# EAGLE board module (EAGLE 9.0.1)
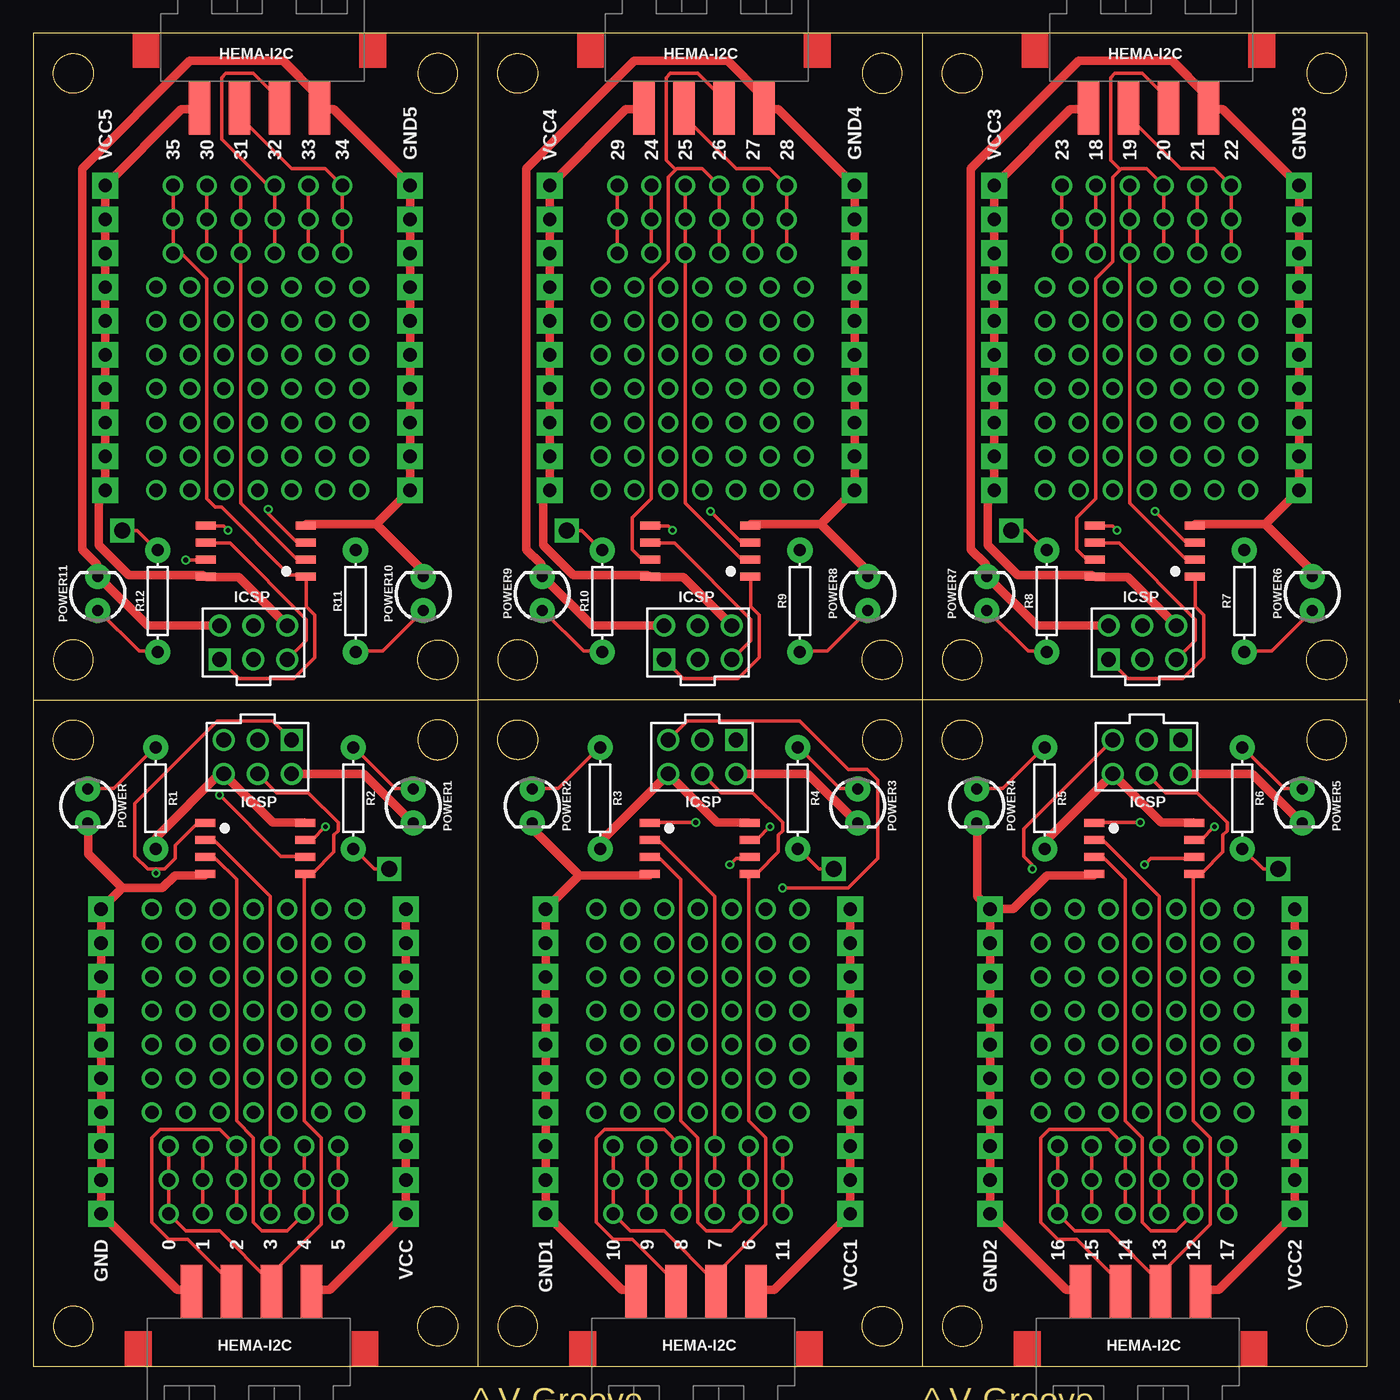
[diagram p0: board, top side]
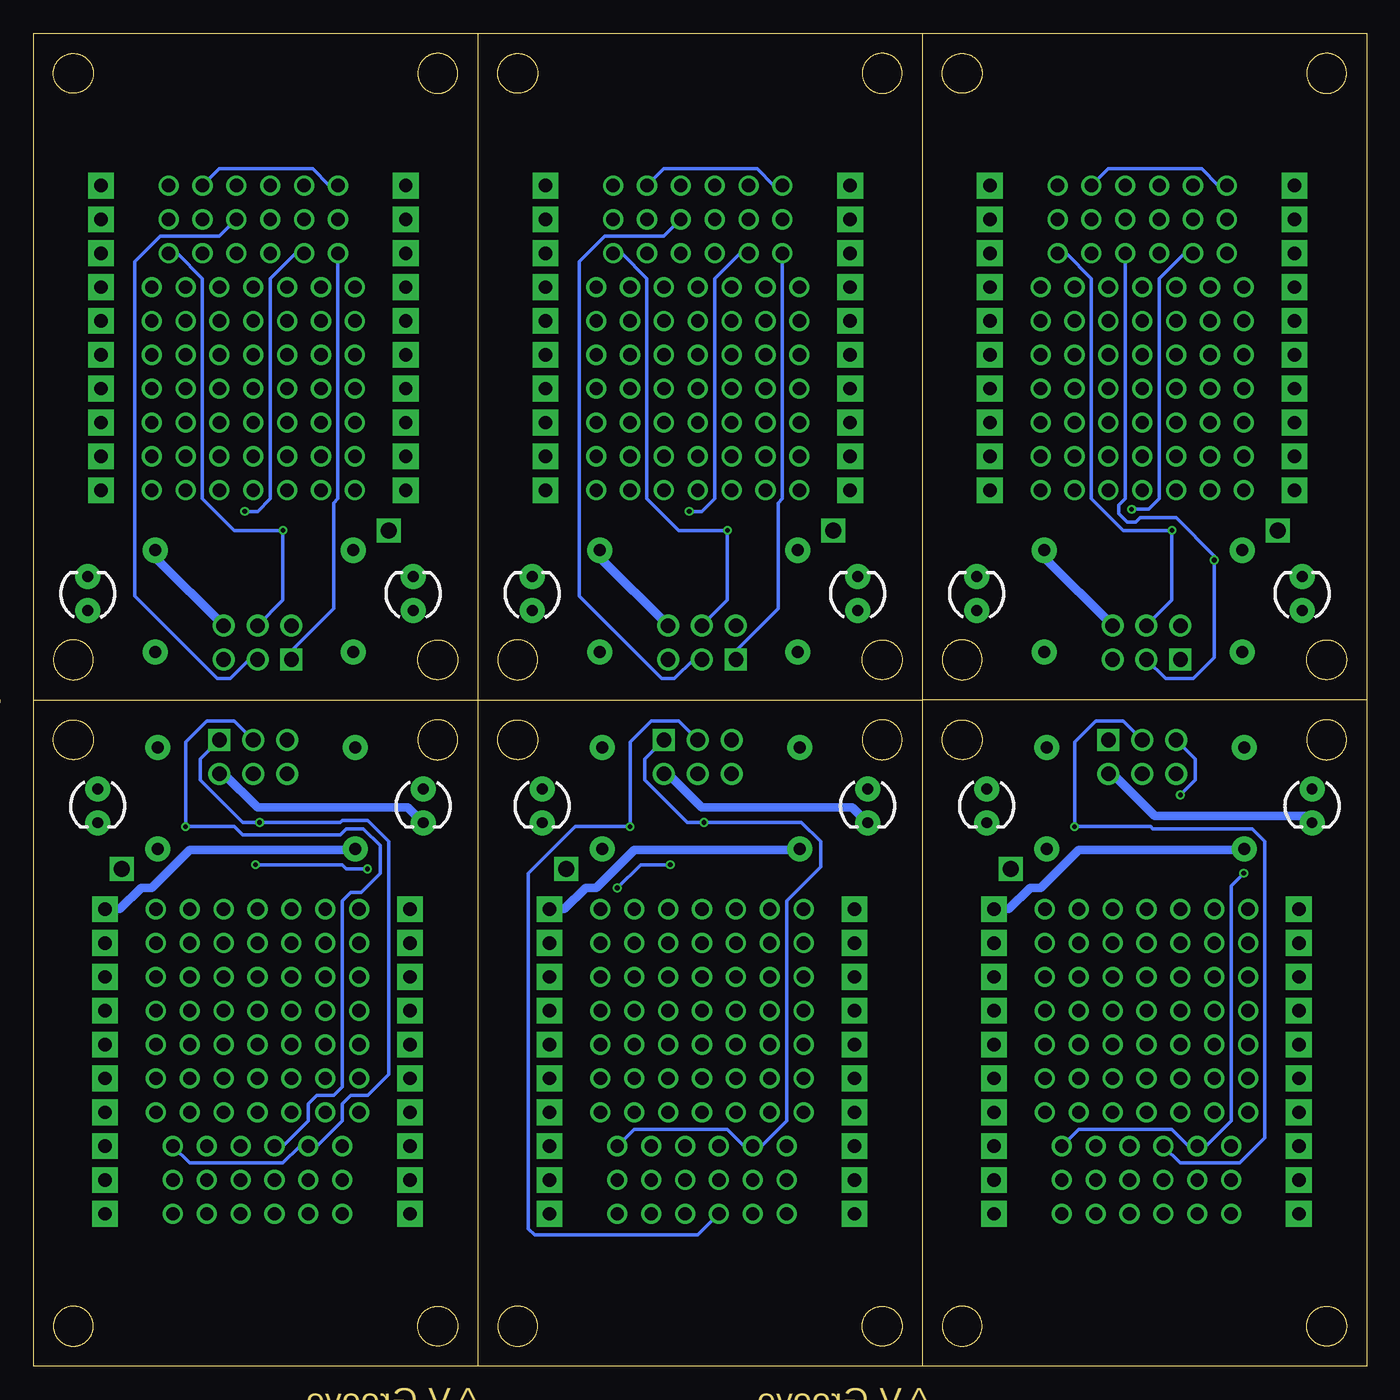
[diagram p1: board, bottom side, seen from below]

Size 100 x 100 mm. Coordinates in mm from the lower left corner, seen from the top.
Outline: 4353 segments
Copper layers (1*16): Top 0.035mm / dielectric 1.5mm / Bottom 0.035mm
Design rules "SeeedStudio_2layer_DRU_no_angle_20140221": minimum track width 6mil, minimum drill 12mil, track to track 6mil, track to pad 6mil, pad to pad 6mil, via to via 6mil, smd to smd 0mil, copper to edge 10mil, drill to drill 10mil, minimum pad ring 10mil, minimum via ring 6mil, stop-mask expansion 2mil, vias tented up to drill 100mil, thermal gap 10mil
Net classes: 0 default: width 0.254 mm, clearance 0.381 mm; 1 VCC: width 0.635 mm, clearance 0.381 mm; 2 GND: width 0.635 mm, clearance 0.381 mm

## Footprints (pad centres in the part's own frame; a part is rotated, then mirrored left to right if it is on the bottom)
3X-PADS = drill 1: P$1 0,0; P$2 0,-2.54; P$3 0,-5.08
10X-PADS = drill 1 pad 1.93 square: P$1 0,0; P$2 0,-2.54; P$3 0,-5.08; P$4 0,-7.62; P$5 0,-10.16; P$6 0,-12.7; P$7 0,-15.24; P$8 0,-17.78; P$9 0,-20.32; P$10 0,-22.86
SOT127P798X216-8N = smd 1.5 x 0.6: GND -3.75,-1.905; PB0 3.75,-1.905; PB1 3.75,-0.635; PB2 3.75,0.635; PB3 -3.75,0.635; PB4 -3.75,-0.635; PB5 -3.75,1.905; VCC 3.75,1.905
HDRV6W64P254_2X3_762X508X868P = drill 1.1 pad 1.65: GND 2.54,1.27; PB0 0,1.27; PB1 -2.54,3.81; PB2 0,3.81; VCC -2.54,1.27 | drill 1.1 pad 1.65 square: PB5 2.54,3.81
PROTO_VIAS_01X01_1.2 = drill 1.2 square: 1 0,0
LED_3MM = drill 0.813 pad 1.88: A -1.27,0; K 1.27,0
AXIAL-0.3 = drill 0.9 pad 1.88: P$1 -3.81,0; P$2 3.81,0
HEMA-I2C = smd 1.6 x 4: A 2.984,5.607; B 5.984,5.607; C 8.984,5.607; D 11.984,5.607
7X-PADS-NC = drill 1: P$1 0,5.08; P$2 0,2.54; P$3 0,0; P$4 0,12.7; P$5 0,10.16; P$6 0,7.62; P$7 0,15.24; P$8 2.54,15.24; P$9 2.54,12.7; P$10 2.54,10.16; P$11 2.54,7.62; P$12 2.54,5.08; P$13 2.54,2.54; P$14 2.54,0; P$15 5.08,5.08; P$16 5.08,2.54; P$17 5.08,0; P$18 5.08,12.7; P$19 5.08,10.16; P$20 5.08,7.62; P$21 5.08,15.24; P$22 7.62,15.24; P$23 7.62,12.7; P$24 7.62,10.16; P$25 7.62,7.62; P$26 7.62,5.08; P$27 7.62,2.54; P$28 7.62,0; P$29 10.16,5.08; P$30 10.16,2.54; P$31 10.16,0; P$32 10.16,12.7; P$33 10.16,10.16; P$34 10.16,7.62; P$35 10.16,15.24; P$36 12.7,15.24; P$37 12.7,12.7; P$38 12.7,10.16; P$39 12.7,7.62; P$40 12.7,5.08; P$41 12.7,2.54; P$42 12.7,0; P$43 15.24,15.24; P$44 15.24,12.7; P$45 15.24,10.16; P$46 15.24,7.62; P$47 15.24,5.08; P$48 15.24,2.54; P$49 15.24,0

## Placement (x,y rotation side)
0  3X-PADS-CONNECTED  [3X-PADS]  10.16,16.51 0 top
1  3X-PADS-CONNECTED  [3X-PADS]  12.7,16.51 0 top
2  3X-PADS-CONNECTED  [3X-PADS]  15.24,16.51 0 top
3  3X-PADS-CONNECTED  [3X-PADS]  17.78,16.51 0 top
4  3X-PADS-CONNECTED  [3X-PADS]  20.32,16.51 0 top
5  3X-PADS-CONNECTED  [3X-PADS]  22.86,16.51 0 top
6  3X-PADS-CONNECTED  [3X-PADS]  53.66,16.51 0 top
7  3X-PADS-CONNECTED  [3X-PADS]  51.12,16.51 0 top
8  3X-PADS-CONNECTED  [3X-PADS]  48.58,16.51 0 top
9  3X-PADS-CONNECTED  [3X-PADS]  46.04,16.51 0 top
10  3X-PADS-CONNECTED  [3X-PADS]  43.5,16.51 0 top
11  3X-PADS-CONNECTED  [3X-PADS]  56.2,16.51 0 top
12  3X-PADS-CONNECTED  [3X-PADS]  87,16.51 0 top
13  3X-PADS-CONNECTED  [3X-PADS]  84.45,16.51 0 top
14  3X-PADS-CONNECTED  [3X-PADS]  81.92,16.51 0 top
15  3X-PADS-CONNECTED  [3X-PADS]  79.38,16.51 0 top
16  3X-PADS-CONNECTED  [3X-PADS]  76.83,16.51 0 top
17  3X-PADS-CONNECTED  [3X-PADS]  89.53,16.51 0 top
18  3X-PADS-CONNECTED  [3X-PADS]  79.69,83.5 180 top
19  3X-PADS-CONNECTED  [3X-PADS]  82.23,83.5 180 top
20  3X-PADS-CONNECTED  [3X-PADS]  84.77,83.5 180 top
21  3X-PADS-CONNECTED  [3X-PADS]  87.31,83.5 180 top
22  3X-PADS-CONNECTED  [3X-PADS]  89.85,83.5 180 top
23  3X-PADS-CONNECTED  [3X-PADS]  77.15,83.5 180 top
24  3X-PADS-CONNECTED  [3X-PADS]  46.35,83.5 180 top
25  3X-PADS-CONNECTED  [3X-PADS]  48.9,83.5 180 top
26  3X-PADS-CONNECTED  [3X-PADS]  51.44,83.5 180 top
27  3X-PADS-CONNECTED  [3X-PADS]  53.98,83.5 180 top
28  3X-PADS-CONNECTED  [3X-PADS]  56.52,83.5 180 top
29  3X-PADS-CONNECTED  [3X-PADS]  43.81,83.5 180 top
30  3X-PADS-CONNECTED  [3X-PADS]  13.02,83.5 180 top
31  3X-PADS-CONNECTED  [3X-PADS]  15.56,83.5 180 top
32  3X-PADS-CONNECTED  [3X-PADS]  18.1,83.5 180 top
33  3X-PADS-CONNECTED  [3X-PADS]  20.64,83.5 180 top
34  3X-PADS-CONNECTED  [3X-PADS]  23.18,83.5 180 top
35  3X-PADS-CONNECTED  [3X-PADS]  10.48,83.5 180 top
GND  10X-PADS  [10X-PADS]  5.08,34.29 0 top
GND1  10X-PADS  [10X-PADS]  38.42,34.29 0 top
GND2  10X-PADS  [10X-PADS]  71.75,34.29 0 top
GND3  10X-PADS  [10X-PADS]  94.93,65.72 180 top
GND4  10X-PADS  [10X-PADS]  61.59,65.72 180 top
GND5  10X-PADS  [10X-PADS]  28.26,65.72 180 top
IC1  ATTINY85-20SU  [SOT127P798X216-8N]  16.64,38.84 0 top
IC2  ATTINY85-20SU  [SOT127P798X216-8N]  49.98,38.84 0 top
IC3  ATTINY85-20SU  [SOT127P798X216-8N]  83.32,38.84 0 top
IC4  ATTINY85-20SU  [SOT127P798X216-8N]  83.37,61.17 180 top
IC5  ATTINY85-20SU  [SOT127P798X216-8N]  50.03,61.17 180 top
IC6  ATTINY85-20SU  [SOT127P798X216-8N]  16.7,61.17 180 top
J1  M20-9980346  [HDRV6W64P254_2X3_762X508X868P]  16.83,43.18 0 top
J2  M20-9980346  [HDRV6W64P254_2X3_762X508X868P]  50.16,43.18 0 top
J3  M20-9980346  [HDRV6W64P254_2X3_762X508X868P]  83.5,43.18 0 top
J4  M20-9980346  [HDRV6W64P254_2X3_762X508X868P]  83.19,56.83 180 top
J5  M20-9980346  [HDRV6W64P254_2X3_762X508X868P]  49.85,56.83 180 top
J6  M20-9980346  [HDRV6W64P254_2X3_762X508X868P]  16.51,56.83 180 top
P1  PROTO_VIAS_01X01-1.2  [PROTO_VIAS_01X01_1.2]  26.68,37.3 0 top
P2  PROTO_VIAS_01X01-1.2  [PROTO_VIAS_01X01_1.2]  60.02,37.3 0 top
P3  PROTO_VIAS_01X01-1.2  [PROTO_VIAS_01X01_1.2]  93.36,37.3 0 top
P4  PROTO_VIAS_01X01-1.2  [PROTO_VIAS_01X01_1.2]  73.33,62.72 180 top
P5  PROTO_VIAS_01X01-1.2  [PROTO_VIAS_01X01_1.2]  39.99,62.72 180 top
P6  PROTO_VIAS_01X01-1.2  [PROTO_VIAS_01X01_1.2]  6.66,62.72 180 top
POWER  [LED_3MM]  4.09,42.04 270 top
POWER1  [LED_3MM]  28.5,42.04 270 top
POWER2  [LED_3MM]  37.43,42.04 270 top
POWER3  [LED_3MM]  61.84,42.04 270 top
POWER4  [LED_3MM]  70.77,42.04 270 top
POWER5  [LED_3MM]  95.17,42.04 270 top
POWER6  [LED_3MM]  95.92,57.97 90 top
POWER7  [LED_3MM]  71.51,57.97 90 top
POWER8  [LED_3MM]  62.59,57.97 90 top
POWER9  [LED_3MM]  38.17,57.97 90 top
POWER10  [LED_3MM]  29.25,57.97 90 top
POWER11  [LED_3MM]  4.84,57.97 90 top
R1  220  [AXIAL-0.3]  9.17,42.61 270 top
R2  220  [AXIAL-0.3]  24,42.61 270 top
R3  220  [AXIAL-0.3]  42.51,42.61 270 top
R4  220  [AXIAL-0.3]  57.34,42.61 270 top
R5  220  [AXIAL-0.3]  75.85,42.61 270 top
R6  220  [AXIAL-0.3]  90.67,42.61 270 top
R7  220  [AXIAL-0.3]  90.84,57.41 90 top
R8  220  [AXIAL-0.3]  76.01,57.41 90 top
R9  220  [AXIAL-0.3]  57.5,57.41 90 top
R10  220  [AXIAL-0.3]  42.67,57.41 90 top
R11  220  [AXIAL-0.3]  24.16,57.41 90 top
R12  220  [AXIAL-0.3]  9.34,57.41 90 top
U$1  HEMA-I2C  [HEMA-I2C]  8.89,0 0 top
U$2  7X-PADS-NC  [7X-PADS-NC]  8.89,19.05 0 top
U$3  HEMA-I2C  [HEMA-I2C]  42.23,0 0 top
U$4  7X-PADS-NC  [7X-PADS-NC]  42.23,19.05 0 top
U$5  HEMA-I2C  [HEMA-I2C]  75.56,0 0 top
U$6  7X-PADS-NC  [7X-PADS-NC]  75.56,19.05 0 top
U$7  HEMA-I2C  [HEMA-I2C]  91.12,100.01 180 top
U$8  7X-PADS-NC  [7X-PADS-NC]  91.12,80.96 180 top
U$9  HEMA-I2C  [HEMA-I2C]  57.78,100.01 180 top
U$10  7X-PADS-NC  [7X-PADS-NC]  57.78,80.96 180 top
U$11  HEMA-I2C  [HEMA-I2C]  24.45,100.01 180 top
U$12  7X-PADS-NC  [7X-PADS-NC]  24.45,80.96 180 top
VCC  10X-PADS  [10X-PADS]  27.94,34.29 0 top
VCC1  10X-PADS  [10X-PADS]  61.28,34.29 0 top
VCC2  10X-PADS  [10X-PADS]  94.61,34.29 0 top
VCC3  10X-PADS  [10X-PADS]  72.07,65.72 180 top
VCC4  10X-PADS  [10X-PADS]  38.73,65.72 180 top
VCC5  10X-PADS  [10X-PADS]  5.4,65.72 180 top

## Library data of the parts
0 1-35 GND GND1-GND5 U$1-U$12 VCC VCC1-VCC5 = BadgeParts
IC1-IC6 = BadgeParts; ARROW_PART_NUMBER: ATTINY85-20SU; ARROW_PRICE/STOCK: https://www.arrow.com/en/products/attiny85-20su/microchip-technology; DESCRIPTION: MICROCHIP - ATTINY85-20SU - MICROCONTROLLER MCU, 8 BIT, ATTINY, 20MHZ, SOIC-8; HEIGHT: 2.16mm; MANUFACTURER_NAME: Microchip; MANUFACTURER_PART_NUMBER: ATTINY85-20SU; RS_PART_NUMBER: 1331674; RS_PRICE/STOCK: http://uk.rs-online.com/web/p/products/1331674
J1-J6 = BadgeParts; ARROW_PART_NUMBER: M20-9980346; ARROW_PRICE/STOCK: http://uk.rs-online.com/web/p/products/7457046P; DESCRIPTION: 03+03 DIL Vertical Pin Header HARWIN M20 Series, 2.54mm Pitch 6 Way 2 Row Straight PCB Header, Solder Termination, 3A; HEIGHT: 8.68mm; MANUFACTURER_NAME: HARWIN; MANUFACTURER_PART_NUMBER: M20-9980346; RS_PART_NUMBER: 7457046P; RS_PRICE/STOCK: http://uk.rs-online.com/web/p/products/7457046P
P1-P6 = dp_devices
POWER POWER1-POWER11 = SparkFun-LED; PROD_ID: DIO-08794
R1-R12 = SparkFun-Resistors

## Nets
GND [GND]: GND.P$1 GND.P$2 GND.P$3 GND.P$4 GND.P$5 GND.P$6 GND.P$7 GND.P$8 GND.P$9 GND.P$10 IC1.GND J1.GND POWER1.K POWER.K U$1.A
GND1 [GND]: GND1.P$1 GND1.P$2 GND1.P$3 GND1.P$4 GND1.P$5 GND1.P$6 GND1.P$7 GND1.P$8 GND1.P$9 GND1.P$10 IC2.GND J2.GND POWER2.K POWER3.K U$3.A
GND2 [GND]: GND2.P$1 GND2.P$2 GND2.P$3 GND2.P$4 GND2.P$5 GND2.P$6 GND2.P$7 GND2.P$8 GND2.P$9 GND2.P$10 IC3.GND J3.GND POWER4.K POWER5.K U$5.A
GND3 [GND]: GND3.P$1 GND3.P$2 GND3.P$3 GND3.P$4 GND3.P$5 GND3.P$6 GND3.P$7 GND3.P$8 GND3.P$9 GND3.P$10 IC4.GND J4.GND POWER6.K POWER7.K U$7.A
GND4 [GND]: GND4.P$1 GND4.P$2 GND4.P$3 GND4.P$4 GND4.P$5 GND4.P$6 GND4.P$7 GND4.P$8 GND4.P$9 GND4.P$10 IC5.GND J5.GND POWER8.K POWER9.K U$9.A
GND5 [GND]: GND5.P$1 GND5.P$2 GND5.P$3 GND5.P$4 GND5.P$5 GND5.P$6 GND5.P$7 GND5.P$8 GND5.P$9 GND5.P$10 IC6.GND J6.GND POWER10.K POWER11.K U$11.A
N$1: POWER1.A R2.P$1
N$2: P1.1 R2.P$2
N$3: POWER2.A R3.P$1
N$4: POWER3.A R4.P$1
N$5: P2.1 R4.P$2
N$6: POWER4.A R5.P$1
N$7: POWER5.A R6.P$1
N$8: P3.1 R6.P$2
N$9: POWER6.A R7.P$1
N$10: POWER7.A R8.P$1
N$11: POWER.A R1.P$1
N$12: P4.1 R8.P$2
N$13: POWER8.A R9.P$1
N$14: POWER9.A R10.P$1
N$15: P5.1 R10.P$2
N$16: POWER10.A R11.P$1
N$17: POWER11.A R12.P$1
N$18: P6.1 R12.P$2
PB0: 0.P$1 0.P$2 0.P$3 IC1.PB0 J1.PB0 U$1.C
PB1: IC1.PB1 J1.PB1
PB2: 2.P$1 2.P$2 2.P$3 IC1.PB2 J1.PB2 U$1.B
PB3: 3.P$1 3.P$2 3.P$3 IC1.PB3
PB4: 4.P$1 4.P$2 4.P$3 IC1.PB4
PB5: 1.P$1 1.P$2 1.P$3 5.P$1 5.P$2 5.P$3 IC1.PB5 J1.PB5
PB6: 10.P$1 10.P$2 10.P$3 IC2.PB0 J2.PB0 U$3.C
PB7: 7.P$1 7.P$2 7.P$3 IC2.PB3
PB8: 6.P$1 6.P$2 6.P$3 IC2.PB4
PB9: 8.P$1 8.P$2 8.P$3 IC2.PB2 J2.PB2 U$3.B
PB10: 9.P$1 9.P$2 9.P$3 11.P$1 11.P$2 11.P$3 IC2.PB5 J2.PB5
PB11: IC2.PB1 J2.PB1
PB12: 16.P$1 16.P$2 16.P$3 IC3.PB0 J3.PB0 U$5.C
PB13: 13.P$1 13.P$2 13.P$3 IC3.PB3
PB14: 12.P$1 12.P$2 12.P$3 IC3.PB4
PB15: 14.P$1 14.P$2 14.P$3 IC3.PB2 J3.PB2 U$5.B
PB16: 15.P$1 15.P$2 15.P$3 17.P$1 17.P$2 17.P$3 IC3.PB5 J3.PB5
PB17: IC3.PB1 J3.PB1
PB18: 22.P$1 22.P$2 22.P$3 IC4.PB0 J4.PB0 U$7.C
PB19: 19.P$1 19.P$2 19.P$3 IC4.PB3
PB20: 18.P$1 18.P$2 18.P$3 IC4.PB4
PB21: 20.P$1 20.P$2 20.P$3 IC4.PB2 J4.PB2 U$7.B
PB22: 21.P$1 21.P$2 21.P$3 23.P$1 23.P$2 23.P$3 IC4.PB5 J4.PB5
PB23: IC4.PB1 J4.PB1
PB24: 28.P$1 28.P$2 28.P$3 IC5.PB0 J5.PB0 U$9.C
PB25: 25.P$1 25.P$2 25.P$3 IC5.PB3
PB26: 24.P$1 24.P$2 24.P$3 IC5.PB4
PB27: 26.P$1 26.P$2 26.P$3 IC5.PB2 J5.PB2 U$9.B
PB28: 27.P$1 27.P$2 27.P$3 29.P$1 29.P$2 29.P$3 IC5.PB5 J5.PB5
PB29: IC5.PB1 J5.PB1
PB30: 34.P$1 34.P$2 34.P$3 IC6.PB0 J6.PB0 U$11.C
PB31: 31.P$1 31.P$2 31.P$3 IC6.PB3
PB32: 30.P$1 30.P$2 30.P$3 IC6.PB4
PB33: 32.P$1 32.P$2 32.P$3 IC6.PB2 J6.PB2 U$11.B
PB34: 33.P$1 33.P$2 33.P$3 35.P$1 35.P$2 35.P$3 IC6.PB5 J6.PB5
PB35: IC6.PB1 J6.PB1
VCC [VCC]: IC1.VCC J1.VCC R1.P$2 U$1.D VCC.P$1 VCC.P$2 VCC.P$3 VCC.P$4 VCC.P$5 VCC.P$6 VCC.P$7 VCC.P$8 VCC.P$9 VCC.P$10
VCC1 [VCC]: IC2.VCC J2.VCC R3.P$2 U$3.D VCC1.P$1 VCC1.P$2 VCC1.P$3 VCC1.P$4 VCC1.P$5 VCC1.P$6 VCC1.P$7 VCC1.P$8 VCC1.P$9 VCC1.P$10
VCC2 [VCC]: IC3.VCC J3.VCC R5.P$2 U$5.D VCC2.P$1 VCC2.P$2 VCC2.P$3 VCC2.P$4 VCC2.P$5 VCC2.P$6 VCC2.P$7 VCC2.P$8 VCC2.P$9 VCC2.P$10
VCC3 [VCC]: IC4.VCC J4.VCC R7.P$2 U$7.D VCC3.P$1 VCC3.P$2 VCC3.P$3 VCC3.P$4 VCC3.P$5 VCC3.P$6 VCC3.P$7 VCC3.P$8 VCC3.P$9 VCC3.P$10
VCC4 [VCC]: IC5.VCC J5.VCC R9.P$2 U$9.D VCC4.P$1 VCC4.P$2 VCC4.P$3 VCC4.P$4 VCC4.P$5 VCC4.P$6 VCC4.P$7 VCC4.P$8 VCC4.P$9 VCC4.P$10
VCC5 [VCC]: IC6.VCC J6.VCC R11.P$2 U$11.D VCC5.P$1 VCC5.P$2 VCC5.P$3 VCC5.P$4 VCC5.P$5 VCC5.P$6 VCC5.P$7 VCC5.P$8 VCC5.P$9 VCC5.P$10

## Tracks (layer width: path | path; a pad name or v marks a point on that pad's centre or on a via)
GND
  Top 0.635: U$1.A 11.75,5.71 10.79,5.71 GND.P$10 GND.P$9 GND.P$8 GND.P$7 GND.P$6 GND.P$5 GND.P$4 GND.P$3 GND.P$2 GND.P$1 6.67,35.88 | J1.GND 24.77,44.45 28.42,40.8 POWER1.K | 6.67,35.88 9.68,35.88 10.64,36.83 12.86,36.83 IC1.GND | 6.67,35.88 4.13,38.42 4.13,40.64 POWER.K
  Bottom 0.635: J1.GND 19.05,44.45 15.88,41.27 4.6,41.27 4.13,40.8 POWER.K
GND1
  Top 0.635: U$3.A 45.09,5.71 44.13,5.71 GND1.P$10 GND1.P$9 GND1.P$8 GND1.P$7 GND1.P$6 GND1.P$5 GND1.P$4 GND1.P$3 GND1.P$2 GND1.P$1 40.96,36.83 | J2.GND 58.1,44.45 61.75,40.8 POWER3.K | 40.96,36.83 46.2,36.83 IC2.GND | 40.96,36.83 37.47,40.32 37.47,40.64 POWER2.K
  Bottom 0.635: J2.GND 52.39,44.45 49.85,41.91 38.58,41.91 37.47,40.8 POWER2.K
GND2
  Top 0.635: U$5.A 78.42,5.71 77.47,5.71 GND2.P$10 GND2.P$9 GND2.P$8 GND2.P$7 GND2.P$6 GND2.P$5 GND2.P$4 GND2.P$3 GND2.P$2 GND2.P$1 | J3.GND 91.44,44.45 95.09,40.8 POWER5.K | GND2.P$1 73.5,34.29 76.04,36.83 79.53,36.83 IC3.GND | GND2.P$1 70.8,35.24 70.8,40.64 POWER4.K
  Bottom 0.635: J3.GND 85.72,44.45 83.19,41.91 71.91,41.91 70.8,40.8 POWER4.K
GND3
  Top 0.635: J4.GND 75.25,55.56 71.6,59.21 POWER7.K 71.44,59.53 71.44,60.17 70.33,61.28 70.33,89.85 78.42,97.95 85.41,97.95 87.95,95.41 87.95,94.61 U$7.A 88.27,94.3 89.22,94.3 GND3.P$10 GND3.P$9 GND3.P$8 GND3.P$7 GND3.P$6 GND3.P$5 GND3.P$4 GND3.P$3 GND3.P$2 GND3.P$1 92.39,63.18 | 92.39,63.18 87.15,63.18 IC4.GND | 92.39,63.18 95.89,59.69 95.89,59.37 POWER6.K
GND4
  Top 0.635: J5.GND 41.91,55.56 38.26,59.21 POWER9.K 38.1,59.53 38.1,60.17 36.99,61.28 36.99,89.85 45.09,97.95 52.07,97.95 54.61,95.41 54.61,94.61 U$9.A 54.93,94.3 55.88,94.3 GND4.P$10 GND4.P$9 GND4.P$8 GND4.P$7 GND4.P$6 GND4.P$5 GND4.P$4 GND4.P$3 GND4.P$2 GND4.P$1 59.05,63.18 | 59.05,63.18 53.82,63.18 IC5.GND | 59.05,63.18 62.55,59.69 62.55,59.37 POWER8.K
GND5
  Top 0.635: J6.GND 8.57,55.56 4.92,59.21 POWER11.K 4.76,59.53 4.76,60.17 3.65,61.28 3.65,89.85 11.75,97.95 18.73,97.95 21.27,95.41 21.27,94.61 U$11.A 21.59,94.3 22.54,94.3 GND5.P$10 GND5.P$9 GND5.P$8 GND5.P$7 GND5.P$6 GND5.P$5 GND5.P$4 GND5.P$3 GND5.P$2 GND5.P$1 25.72,63.18 | 25.72,63.18 20.48,63.18 IC6.GND | 25.72,63.18 29.21,59.69 29.21,59.37 POWER10.K
N$1
  Top 0.254: POWER1.A 28.42,43.34 27.15,43.34 24.13,46.35 R2.P$1
N$2
  Top 0.254: P1.1 25.56,37.31 24.13,38.73 R2.P$2
N$3
  Top 0.254: POWER2.A 37.47,43.34 39.37,43.34 42.39,46.35 R3.P$1
N$4
  Top 0.254: POWER3.A 61.75,43.34 60.48,43.34 57.47,46.35 R4.P$1
N$5
  Top 0.254: P2.1 60.01,37.31 58.9,37.31 57.47,38.73 R4.P$2
N$6
  Top 0.254: POWER4.A 70.8,43.34 72.71,43.34 75.72,46.35 R5.P$1
N$7
  Top 0.254: POWER5.A 95.09,43.34 93.82,43.34 90.81,46.35 R6.P$1
N$8
  Top 0.254: P3.1 93.34,37.31 92.23,37.31 90.81,38.73 R6.P$2
N$9
  Top 0.254: R7.P$1 90.96,53.66 92.87,53.66 95.89,56.67 POWER6.A
N$10
  Top 0.254: R8.P$1 75.88,53.66 74.61,53.66 71.6,56.67 POWER7.A
N$11
  Top 0.254: POWER.A 4.13,43.34 6.03,43.34 9.05,46.35 R1.P$1
N$12
  Top 0.254: P4.1 73.34,62.71 74.45,62.71 75.88,61.28 R8.P$2
N$13
  Top 0.254: R9.P$1 57.63,53.66 59.53,53.66 62.55,56.67 POWER8.A
N$14
  Top 0.254: R10.P$1 42.55,53.66 41.27,53.66 38.26,56.67 POWER9.A
N$15
  Top 0.254: P5.1 40.01,62.71 41.12,62.71 42.55,61.28 R10.P$2
N$16
  Top 0.254: R11.P$1 24.29,53.66 26.19,53.66 29.21,56.67 POWER10.A
N$17
  Top 0.254: R12.P$1 9.21,53.66 7.94,53.66 4.92,56.67 POWER11.A
N$18
  Top 0.254: P6.1 6.67,62.71 7.78,62.71 9.21,61.28 R12.P$2
PB0
  Top 0.254: J1.PB0 18.26,43.02 20.64,43.02 22.86,40.8 22.86,40.16 22.54,39.85 22.54,38.58 20.95,36.99 20.48,36.99 IC1.PB0 20.32,36.83 20.32,18.41 21.59,17.14 21.59,10.64 17.62,6.67 U$1.C 17.78,5.71 17.78,6.35 13.97,10.16 11.43,10.16 0.P$3 0.P$2 0.P$1
PB1  (via drill 0.35)
  Top 0.254: v13.97,42.86 18.57,38.26 20.32,38.26 IC1.PB1
  Bottom 0.254: v13.97,42.86 12.86,43.97 12.86,45.56 J1.PB1
PB2  (via drill 0.35)
  Top 0.254: v21.91,40.48 20.95,39.53 20.48,39.53 IC1.PB2 | 2.P$3 2.P$2 2.P$1 13.97,17.78 9.53,17.78 8.89,17.14 8.89,10.79 10.16,9.53 11.59,9.53 14.76,6.35 14.76,5.71 U$1.B
  Bottom 0.254: J1.PB2 18.26,48.42 20.32,48.42 21.91,46.83 v21.91,40.48 16.19,40.48 16.03,40.32 8.57,40.32 7.62,39.37 7.62,17.14 9.53,15.24 13.97,15.24 2.P$1
PB3
  Top 0.254: 3.P$3 3.P$2 3.P$1 17.78,35.24 13.65,39.37 13.02,39.37 IC1.PB3
PB4
  Top 0.254: 4.P$1 4.P$2 4.P$3 19.05,10.16 17.14,10.16 16.51,10.79 16.51,17.14 15.24,18.41 15.24,36.51 13.65,38.1 13.02,38.1 IC1.PB4
PB5  (via drill 0.35)
  Top 0.254: 1.P$3 1.P$2 1.P$1 | 5.P$3 5.P$2 5.P$1 | 9.21,37.31 8.57,37.31 7.62,38.26 7.62,42.23 13.81,48.42 17.94,48.42 J1.PB5 | 9.21,37.31 9.84,37.31 10.64,38.1 10.64,39.05 12.22,40.64 12.86,40.64 IC1.PB5 | 9.21,37.31 v9.21,36.99
  Bottom 0.254: 5.P$1 21.59,17.78 14.61,17.78 13.34,16.51 1.P$1 12.06,16.51 10.16,18.41 10.16,36.04 v9.21,36.99
PB6
  Top 0.254: J2.PB0 51.59,43.02 53.98,43.02 56.2,40.8 56.2,40.16 55.88,39.85 55.88,38.58 54.29,36.99 53.82,36.99 IC2.PB0 53.66,36.83 53.66,18.41 54.93,17.14 54.93,10.64 50.96,6.67 U$3.C 51.12,5.71 51.12,6.35 47.31,10.16 44.77,10.16 10.P$3 10.P$2 10.P$1
PB7
  Top 0.254: 7.P$3 7.P$2 7.P$1 51.12,35.24 46.99,39.37 46.35,39.37 IC2.PB3
PB8
  Top 0.254: 6.P$1 6.P$2 6.P$3 52.39,10.16 50.48,10.16 49.85,10.79 49.85,17.14 48.58,18.41 48.58,36.51 46.99,38.1 46.35,38.1 IC2.PB4
PB9  (via drill 0.35)
  Top 0.254: v55.24,40.48 54.29,39.53 53.82,39.53 IC2.PB2 | 8.P$3 8.P$2 8.P$1 47.31,17.78 42.86,17.78 42.23,17.14 42.23,10.79 43.5,9.53 44.93,9.53 48.1,6.35 48.1,5.71 U$3.B
  Bottom 0.254: J2.PB2 51.59,48.42 53.66,48.42 55.24,46.83 v55.24,40.48 59.37,40.48 62.87,36.99 62.87,10.32 62.39,9.84 50.16,9.84 8.P$3
PB10  (via drill 0.35)
  Top 0.254: v49.69,40.8 46.35,40.8 IC2.PB5 | 9.P$3 9.P$2 9.P$1 | 11.P$3 11.P$2 11.P$1
  Bottom 0.254: J2.PB5 54.13,45.56 54.13,43.97 50.96,40.8 v49.69,40.8 42.39,40.8 40.96,39.37 40.96,37.47 43.5,34.92 43.5,18.41 45.4,16.51 9.P$1 46.67,16.51 47.94,17.78 54.93,17.78 11.P$1
PB11  (via drill 0.35)
  Top 0.254: v52.23,37.62 52.7,38.1 53.66,38.1 IC2.PB1 | v56.2,35.88 61.12,35.88 63.34,38.1 63.34,43.97 62.55,44.77 61.12,44.77 57.47,48.42 49.05,48.42 J2.PB1
  Bottom 0.254: v52.23,37.62 54.45,37.62 v56.2,35.88
PB12
  Top 0.254: J3.PB0 84.93,43.02 87.31,43.02 89.53,40.8 89.53,40.16 89.22,39.85 89.22,38.58 87.63,36.99 87.15,36.99 IC3.PB0 87,36.83 87,18.41 88.27,17.14 88.27,10.64 84.3,6.67 U$5.C 84.45,5.71 84.45,6.35 80.64,10.16 78.11,10.16 16.P$3 16.P$2 16.P$1
PB13
  Top 0.254: 13.P$3 13.P$2 13.P$1 84.45,35.24 80.33,39.37 79.69,39.37 IC3.PB3
PB14
  Top 0.254: 12.P$1 12.P$2 12.P$3 85.72,10.16 83.82,10.16 83.19,10.79 83.19,17.14 81.92,18.41 81.92,36.51 80.33,38.1 79.69,38.1 IC3.PB4
PB15  (via drill 0.35)
  Top 0.254: v88.58,40.48 87.63,39.53 87.15,39.53 IC3.PB2 | 14.P$3 14.P$2 14.P$1 80.64,17.78 76.2,17.78 75.56,17.14 75.56,10.79 76.83,9.53 78.26,9.53 81.44,6.35 81.44,5.71 U$5.B
  Bottom 0.254: J3.PB2 84.93,48.42 87,48.42 88.58,46.83 v88.58,40.48 84.93,40.48 84.3,39.85 76.99,39.85 76.52,40.32 75.25,40.32 73.98,39.05 73.98,36.99 75.41,35.56 76.2,35.56 76.83,34.92 76.83,20.95 77.47,20.32 78.74,20.32 79.38,19.68 79.38,18.41 81.28,16.51 14.P$1
PB16  (via drill 0.35)
  Top 0.254: v83.03,40.8 79.69,40.8 IC3.PB5 | 15.P$3 15.P$2 15.P$1 | 17.P$3 17.P$2 17.P$1
  Bottom 0.254: J3.PB5 87.47,45.56 87.47,43.97 84.3,40.8 v83.03,40.8 76.99,40.8 76.83,40.96 74.93,40.96 73.34,39.37 73.34,21.91 74.93,20.32 76.2,20.32 76.83,19.68 76.83,18.41 78.74,16.51 15.P$1 80.01,16.51 81.28,15.24 88.27,15.24 17.P$1
PB17  (via drill 0.35)
  Top 0.254: v83.34,37.62 83.82,38.1 87,38.1 IC3.PB1 | v74.93,37.31 74.93,37.62 74.3,38.26 74.3,40.32 J3.PB1
  Bottom 0.254: v83.34,37.62 76.83,37.62 76.52,37.31 v74.93,37.31
PB18  (via drill 0.35)
  Top 0.254: v81.28,62.71 80.96,63.02 79.69,63.02 IC4.PB0 | 22.P$1 22.P$2 22.P$3 88.58,89.85 86.04,89.85 82.23,93.66 82.23,94.3 U$7.C
  Bottom 0.254: J4.PB0 81.28,57.47 v81.28,62.71 84.93,62.71 87.31,65.09 87.31,81.6 89.22,83.5 22.P$1
PB19
  Top 0.254: 19.P$3 19.P$2 19.P$1 82.23,64.77 86.36,60.64 87,60.64 IC4.PB3
PB20  (via drill 0.35)
  Top 0.254: 18.P$3 18.P$2 18.P$1 | v84.14,64.14 86.36,61.91 87,61.91 IC4.PB4
  Bottom 0.254: v84.14,64.14 83.19,64.14 82.23,65.09 82.23,81.6 80.33,83.5 18.P$1
PB21
  Top 0.254: 81.52,89.77 81.6,89.85 83.5,89.85 20.P$3 20.P$2 20.P$1 | 81.52,89.77 80.96,89.22 80.96,82.87 79.69,81.6 79.69,65.09 78.26,63.66 78.26,61.28 78.9,60.64 79.53,60.64 IC4.PB2 | 81.52,89.77 80.8,90.49 80.8,96.68 81.12,97 83.19,97 85.09,95.09 85.09,94.46 U$7.B
  Bottom 0.254: J4.PB2 83.82,53.02 85.25,51.59 86.2,51.59 92.39,57.78 92.39,82.87 90.49,84.77 86.04,84.77 20.P$2
PB22
  Top 0.254: J4.PB5 82.07,51.59 86.2,51.59 87.79,53.18 87.79,56.36 87.15,56.99 87.15,59.21 IC4.PB5 | 23.P$1 23.P$2 23.P$3 | 21.P$1 21.P$2 21.P$3
  Bottom 0.254: 23.P$3 77.79,88.58 79.06,89.85 86.04,89.85 21.P$3 | J4.PB5 80.64,53.66 77.47,56.83 77.47,64.77 77.15,65.09 23.P$1
PB23
  Top 0.254: J4.PB1 87.15,54.45 87.15,56.04 81.44,61.75 79.69,61.75 IC4.PB1
PB24  (via drill 0.35)
  Top 0.254: v47.94,62.71 47.62,63.02 46.35,63.02 IC5.PB0 | 28.P$1 28.P$2 28.P$3 55.24,89.85 52.7,89.85 48.9,93.66 48.9,94.3 U$9.C
  Bottom 0.254: J5.PB0 47.94,57.47 v47.94,62.71 51.59,62.71 53.98,65.09 53.98,81.6 55.88,83.5 28.P$1
PB25
  Top 0.254: 25.P$3 25.P$2 25.P$1 48.9,64.77 53.02,60.64 53.66,60.64 IC5.PB3
PB26  (via drill 0.35)
  Top 0.254: 24.P$3 24.P$2 24.P$1 | v50.8,64.14 53.02,61.91 53.66,61.91 IC5.PB4
  Bottom 0.254: v50.8,64.14 49.85,64.14 48.9,65.09 48.9,81.6 46.99,83.5 24.P$1
PB27
  Top 0.254: 48.18,89.77 48.26,89.85 50.16,89.85 26.P$3 26.P$2 26.P$1 | 48.18,89.77 47.62,89.22 47.62,82.87 46.35,81.6 46.35,65.09 44.93,63.66 44.93,61.28 45.56,60.64 46.2,60.64 IC5.PB2 | 48.18,89.77 47.47,90.49 47.47,96.68 47.78,97 49.85,97 51.75,95.09 51.75,94.46 U$9.B
  Bottom 0.254: J5.PB2 50.48,53.02 51.91,51.59 52.86,51.59 59.05,57.78 59.05,82.87 57.15,84.77 52.7,84.77 26.P$2
PB28
  Top 0.254: J5.PB5 48.74,51.59 52.86,51.59 54.45,53.18 54.45,56.36 53.82,56.99 53.82,59.21 IC5.PB5 | 29.P$1 29.P$2 29.P$3 | 27.P$1 27.P$2 27.P$3
  Bottom 0.254: 29.P$3 44.45,88.58 45.72,89.85 52.7,89.85 27.P$3 | J5.PB5 47.31,53.66 44.13,56.83 44.13,64.77 43.81,65.09 29.P$1
PB29
  Top 0.254: J5.PB1 53.82,54.45 53.82,56.04 48.1,61.75 46.35,61.75 IC5.PB1
PB30  (via drill 0.35)
  Top 0.254: v14.61,62.71 14.29,63.02 13.02,63.02 IC6.PB0 | 34.P$1 34.P$2 34.P$3 21.91,89.85 19.37,89.85 15.56,93.66 15.56,94.3 U$11.C
  Bottom 0.254: J6.PB0 14.61,57.47 v14.61,62.71 18.26,62.71 20.64,65.09 20.64,81.6 22.54,83.5 34.P$1
PB31
  Top 0.254: 31.P$3 31.P$2 31.P$1 15.56,64.77 19.68,60.64 20.32,60.64 IC6.PB3
PB32  (via drill 0.35)
  Top 0.254: 30.P$3 30.P$2 30.P$1 | v17.62,64.29 17.62,63.98 19.68,61.91 20.32,61.91 IC6.PB4
  Bottom 0.254: v17.62,64.29 16.35,64.29 15.56,65.09 15.56,81.6 13.65,83.5 30.P$1
PB33  (via drill 0.35)
  Top 0.254: v11.43,60.48 12.86,60.48 IC6.PB2 | 32.P$1 32.P$2 32.P$3 17.62,88.58 14.13,92.08 14.13,96.68 14.45,97 16.51,97 18.41,95.09 18.41,94.46 U$11.B
  Bottom 0.254: J6.PB2 15.08,51.59 13.02,51.59 11.43,53.18 v11.43,60.48 11.43,60.8 14.29,63.66 16.99,63.66 17.3,63.34 17.94,63.34 18.57,63.98 18.57,64.61 18.1,65.09 32.P$1
PB34
  Top 0.254: J6.PB5 15.4,51.59 19.53,51.59 21.11,53.18 21.11,56.36 20.48,56.99 20.48,59.21 IC6.PB5 20.32,59.37 19.21,59.37 14.13,64.45 13.65,64.45 13.02,65.09 13.02,81.6 11.11,83.5 35.P$1 35.P$2 35.P$3 | 33.P$1 33.P$2 33.P$3
  Bottom 0.254: 35.P$3 11.11,88.58 12.38,89.85 19.37,89.85 33.P$3
PB35
  Top 0.254: J6.PB1 20.48,54.45 20.48,56.04 14.76,61.75 13.02,61.75 IC6.PB1
VCC
  Top 0.635: IC1.VCC 20.32,40.8 17.94,40.8 J1.VCC 14.13,44.61 9.21,39.69 9.21,38.89 R1.P$2 | VCC.P$1 VCC.P$2 VCC.P$3 VCC.P$4 VCC.P$5 VCC.P$6 VCC.P$7 VCC.P$8 VCC.P$9 VCC.P$10 22.23,5.71 20.95,5.71 U$1.D
  Bottom 0.635: VCC.P$1 26.83,34.29 25.24,35.88 24.45,35.88 21.59,38.73 9.21,38.73 R1.P$2
VCC1
  Top 0.635: IC2.VCC 53.66,40.8 51.28,40.8 J2.VCC 42.55,39.37 42.55,38.89 R3.P$2 | VCC1.P$1 VCC1.P$2 VCC1.P$3 VCC1.P$4 VCC1.P$5 VCC1.P$6 VCC1.P$7 VCC1.P$8 VCC1.P$9 VCC1.P$10 55.56,5.71 54.29,5.71 U$3.D
  Bottom 0.635: VCC1.P$1 60.17,34.29 58.58,35.88 57.78,35.88 54.93,38.73 42.55,38.73 R3.P$2
VCC2
  Top 0.635: IC3.VCC 87,40.8 84.61,40.8 J3.VCC 75.88,39.37 75.88,38.89 R5.P$2 | VCC2.P$1 VCC2.P$2 VCC2.P$3 VCC2.P$4 VCC2.P$5 VCC2.P$6 VCC2.P$7 VCC2.P$8 VCC2.P$9 VCC2.P$10 88.9,5.71 87.63,5.71 U$5.D
  Bottom 0.635: VCC2.P$1 93.5,34.29 91.92,35.88 91.12,35.88 88.27,38.73 75.88,38.73 R5.P$2
VCC3
  Top 0.635: J4.VCC 82.07,59.21 79.69,59.21 IC4.VCC 79.38,59.37 73.82,59.37 71.6,61.59 71.6,65.25 VCC3.P$1 VCC3.P$2 VCC3.P$3 VCC3.P$4 VCC3.P$5 VCC3.P$6 VCC3.P$7 VCC3.P$8 VCC3.P$9 VCC3.P$10 77.79,94.3 79.06,94.3 U$7.D
  Bottom 0.635: J4.VCC 90.81,60.64 90.81,61.12 R7.P$2
VCC4
  Top 0.635: J5.VCC 48.74,59.21 46.35,59.21 IC5.VCC 46.04,59.37 40.48,59.37 38.26,61.59 38.26,65.25 VCC4.P$1 VCC4.P$2 VCC4.P$3 VCC4.P$4 VCC4.P$5 VCC4.P$6 VCC4.P$7 VCC4.P$8 VCC4.P$9 VCC4.P$10 44.45,94.3 45.72,94.3 U$9.D
  Bottom 0.635: J5.VCC 57.47,60.64 57.47,61.12 R9.P$2
VCC5
  Top 0.635: J6.VCC 15.4,59.21 13.02,59.21 IC6.VCC 12.7,59.37 7.14,59.37 4.92,61.59 4.92,65.25 VCC5.P$1 VCC5.P$2 VCC5.P$3 VCC5.P$4 VCC5.P$5 VCC5.P$6 VCC5.P$7 VCC5.P$8 VCC5.P$9 VCC5.P$10 11.11,94.3 12.38,94.3 U$11.D
  Bottom 0.635: J6.VCC 24.13,60.64 24.13,61.12 R11.P$2

## Text on the board
Dimension: < V-Groove | ^ V-Groove | ^ V-Groove